# Altium PCB ControlPCB.PcbDoc
Units mm, origin at the board's own origin, x right, y up, seen from the top; angles counter-clockwise.
Board outline 50 x 100 mm, 4 copper layers (Top Layer, Layer 2, Layer 3, Bottom Layer), stack 1.369 mm thick; 84 components, 77 nets, 353 pads, 81 vias.
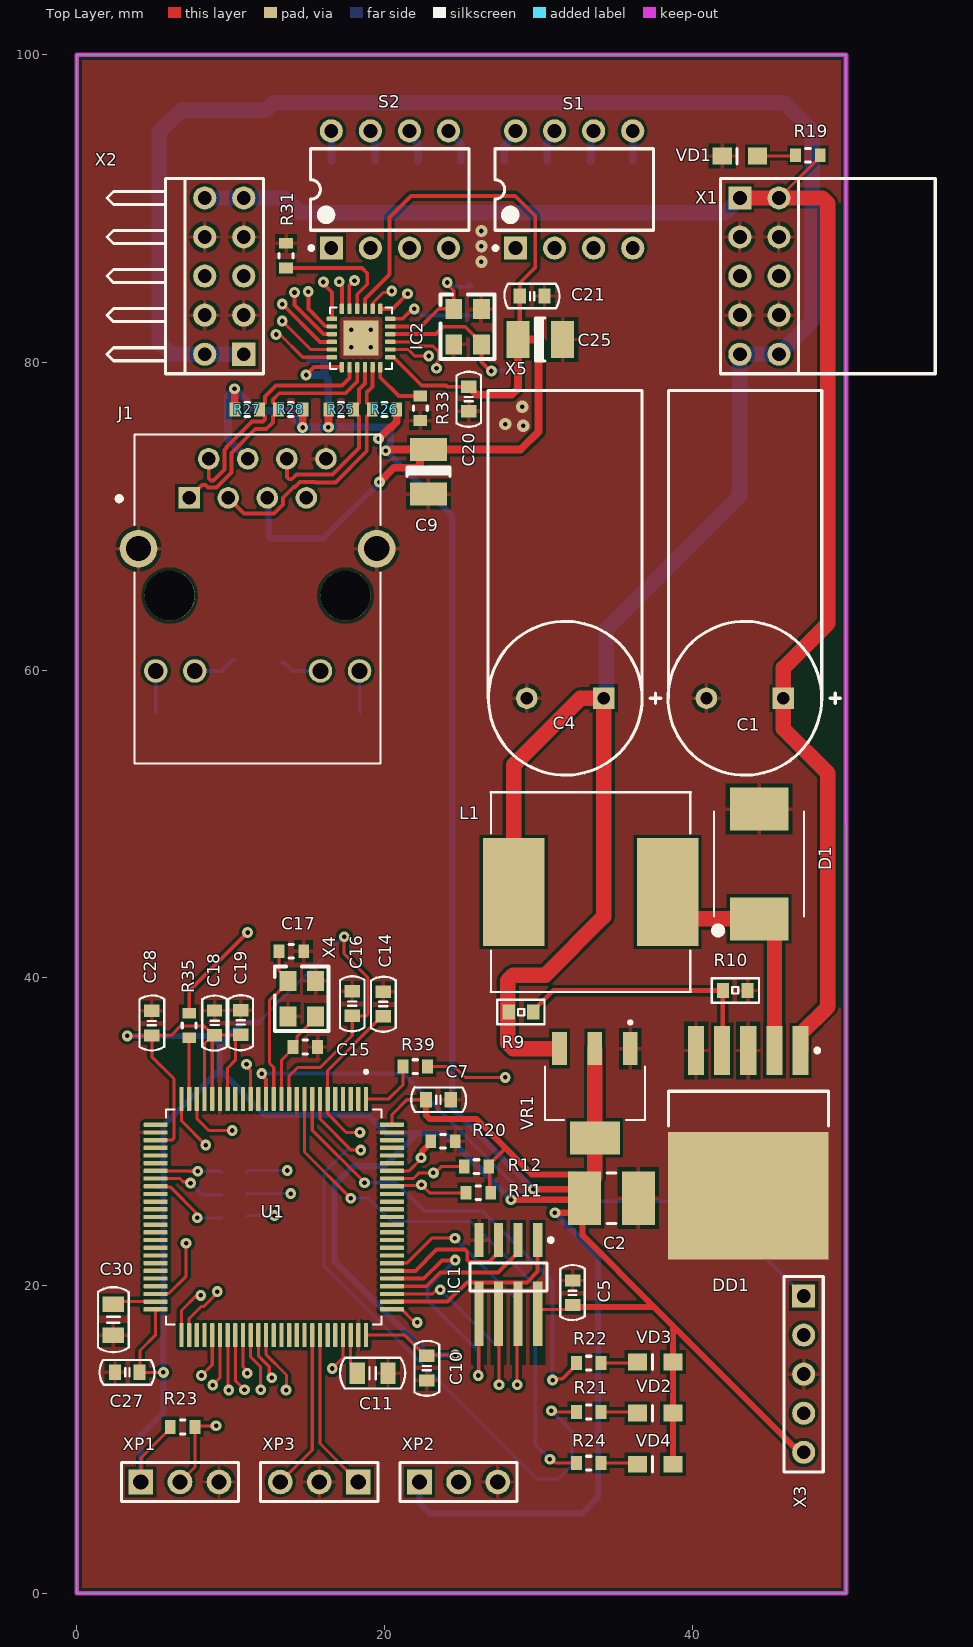
[diagram p0: Top Layer view]
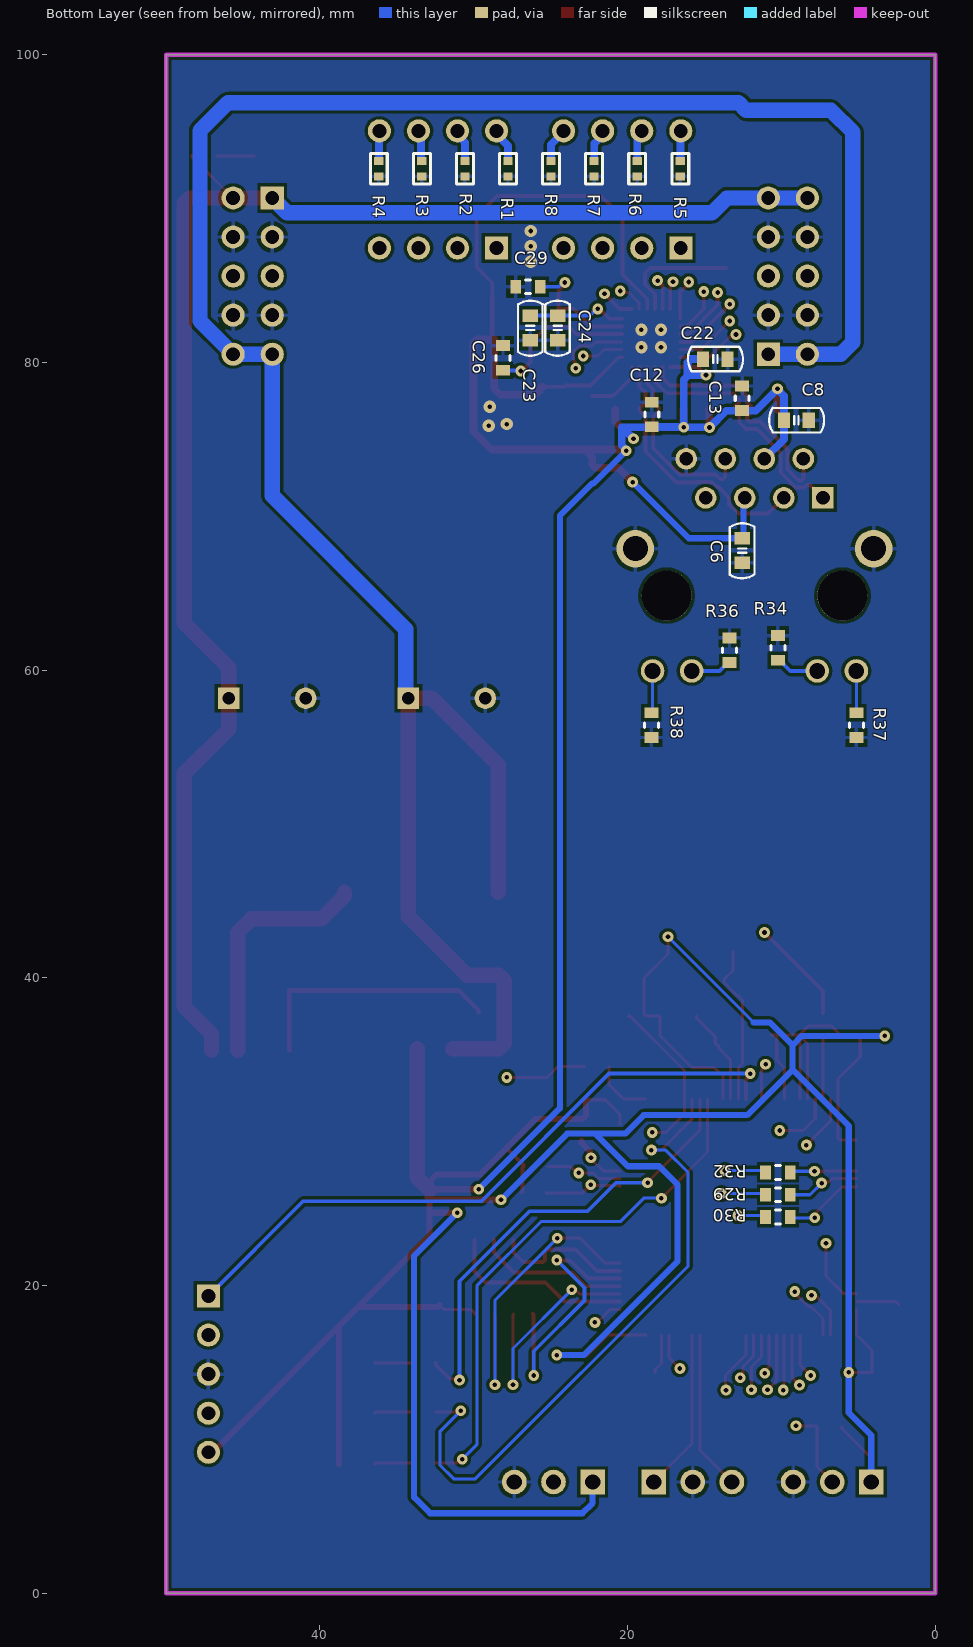
[diagram p1: Bottom Layer view, seen from below]
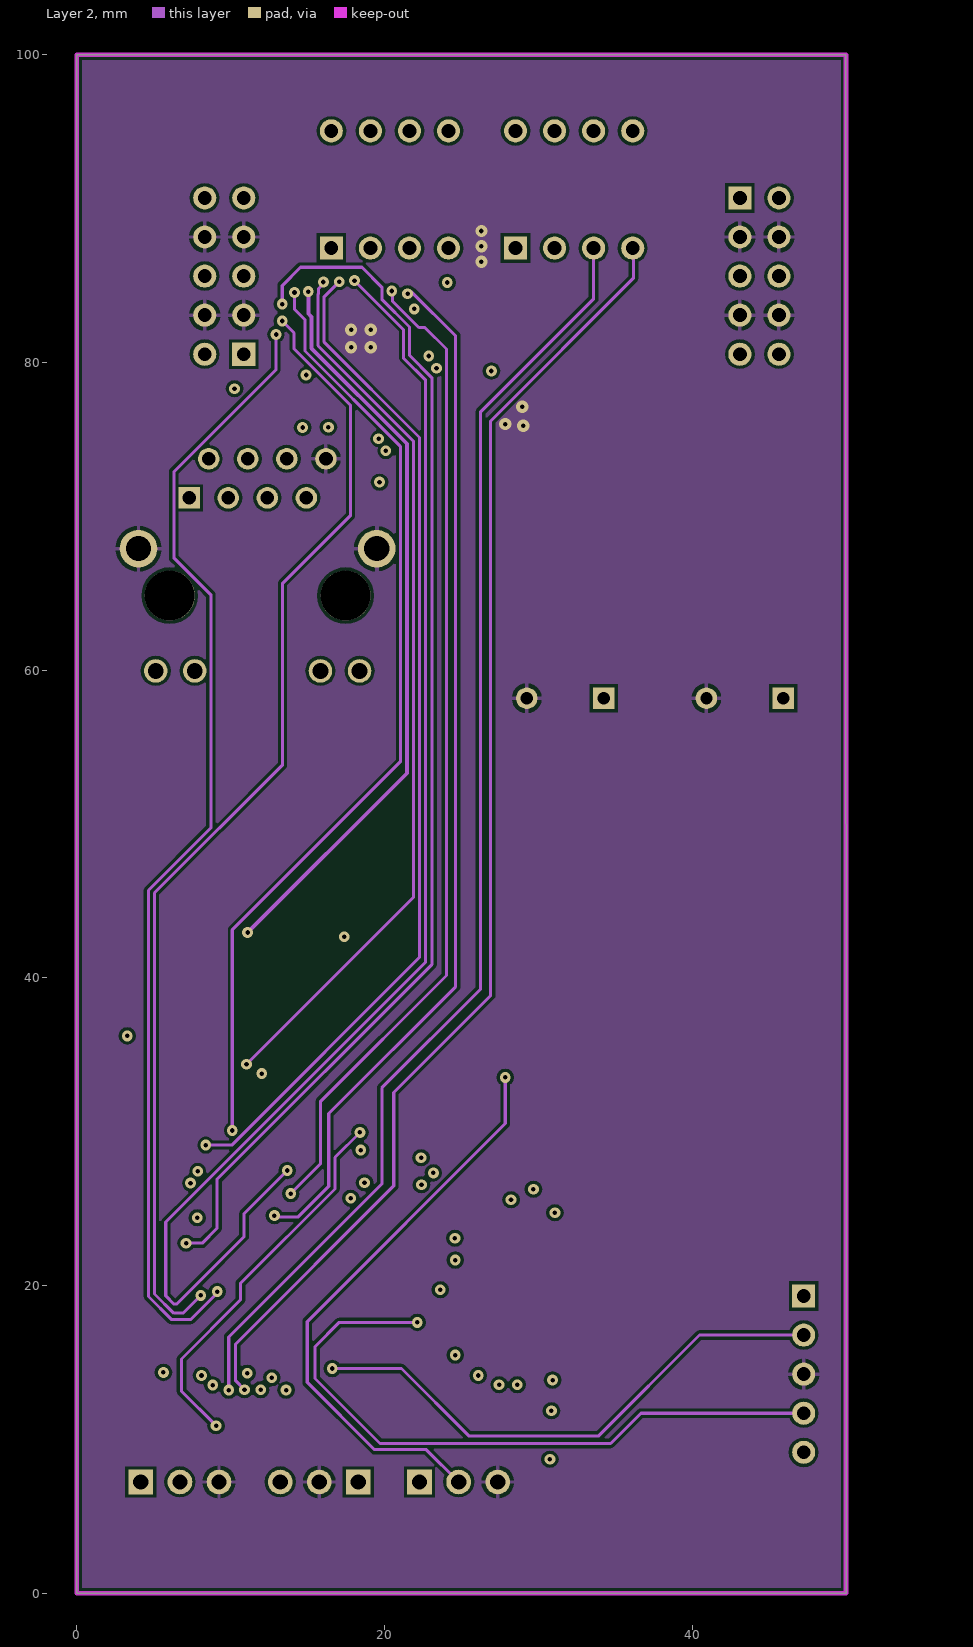
[diagram p2: Layer 2]
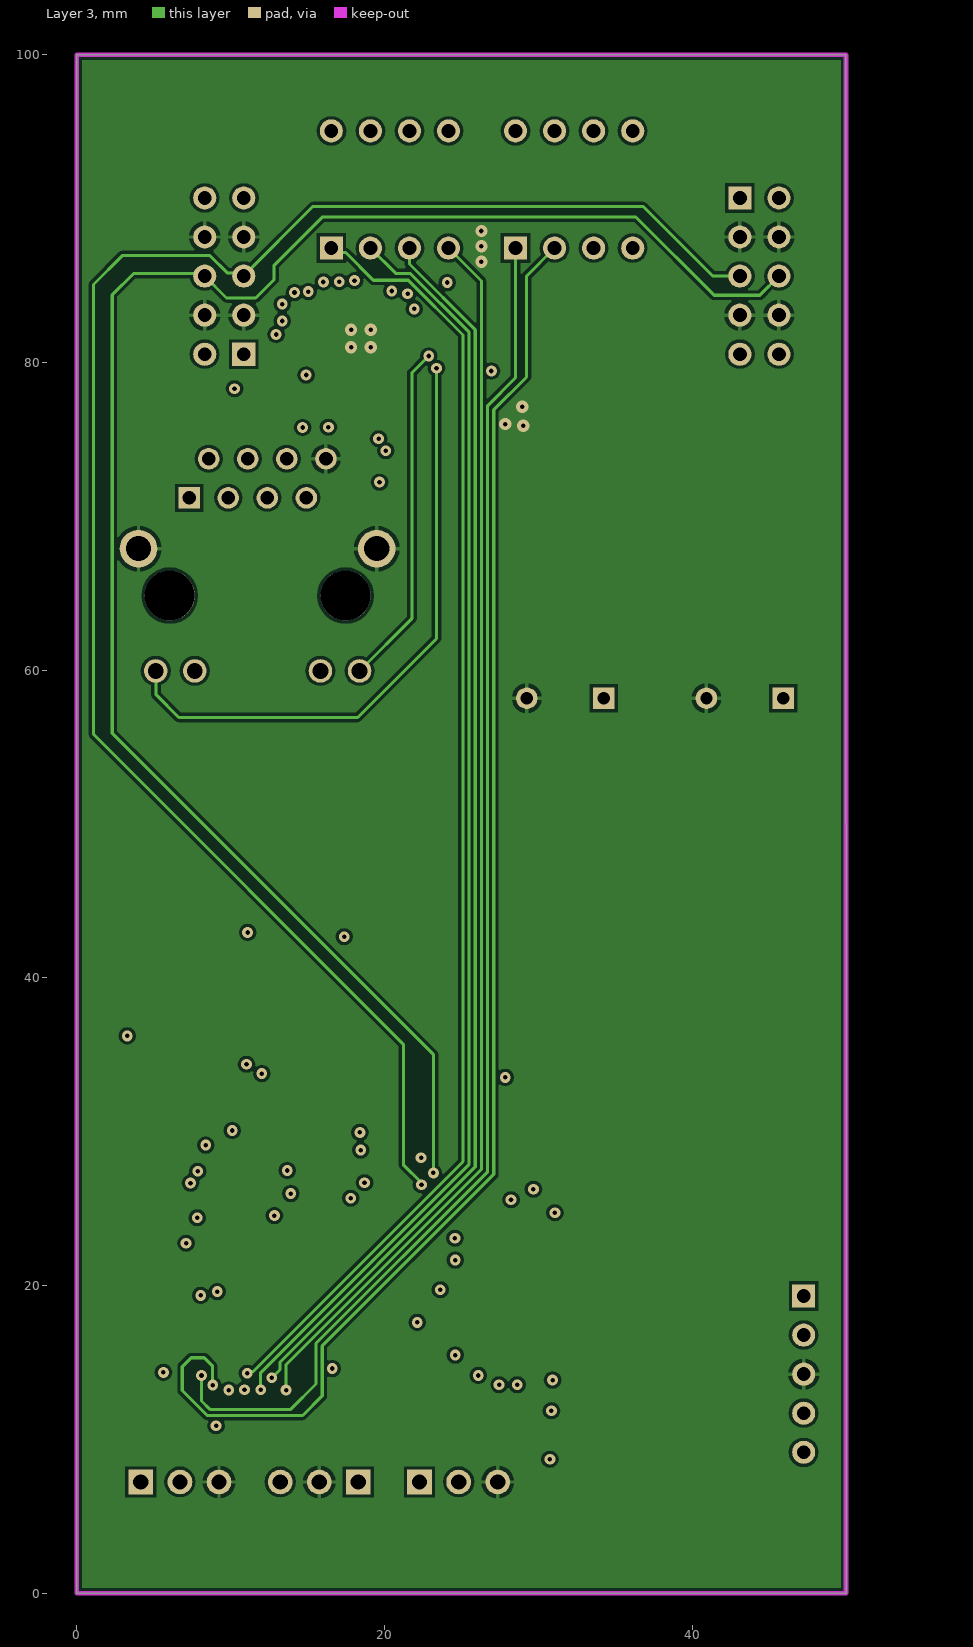
[diagram p3: Layer 3]

## Layer stack, top to bottom
Top Solder: solder mask 0.0254, SM-001, Dk 4
Top Layer: signal copper 0.035
Dielectric 1: prepreg 0.1295, PP-017, Dk 4.3
Dielectric 2: prepreg 0.1295, PP-017, Dk 4.3
Layer 2: signal copper 0.035
Dielectric 3: core 0.7112, Core-039, Dk 4.8
Layer 3: signal copper 0.035
Dielectric 4: prepreg 0.1295, PP-017, Dk 4.3
Dielectric 5: prepreg 0.1295, PP-017, Dk 4.3
Bottom Layer: signal copper 0.035
Bottom Solder: solder mask 0.0254, SM-001, Dk 4

## Board outline
0,0 50,0 50,100 0,100

## Design rules (kind name [scope] priority, off if disabled: settings)
Clearance Clearance_1 [InNetClass('ISO') vs InNet('GND')] p1: gap=1 ignorepadtopadclearanceinfootprint=FALSE
Clearance [All] p2: gap=0.2 ignorepadtopadclearanceinfootprint=FALSE
Clearance Clearance_2 [All] p3: gap=0.2 ignorepadtopadclearanceinfootprint=TRUE except(0: Arc-SMDPad Arc-THPad Arc-Via Track-SMDPad Track-THPad Track-Via SMDPad-SMDPad SMDPad-THPad SMDPad-Via Via-Hole)
ComponentClearance [InComponentClass('J*') vs InComponentClass('J*')] p1: gap=0.01 collisioncheckmode=3 verticalgap=0.01 showdistances=FALSE
DiffPairsRouting [All] p1: maxlimit=0.254 minlimit=0.2 mostfreqgap=0.254 toplayer_minwidth=0.25 toplayer_maxwidth=0.381 toplayer_prefwidth=0.381 midlayer1_minwidth=0.25 midlayer1_maxwidth=0.381 midlayer1_prefwidth=0.381 midlayer2_minwidth=0.25 midlayer2_maxwidth=0.381 midlayer2_prefwidth=0.381 bottomlayer_minwidth=0.25 bottomlayer_maxwidth=0.381 bottomlayer_prefwidth=0.381 maxuncoupledlength=12.7
HoleSize [All] p1: absolutevalues=TRUE maxlimit=5 minlimit=0.025 maxpercent=80.000 minpercent=20.000
MinimumSolderMaskSliver [All] p1: minsoldermaskwidth=0
PolygonConnect [All] p1: connectstyle=Relief reliefconductorwidth=0.254 reliefentries=4 polygonreliefangle="90 Angle" airgapwidth=0.254
RoutingVias [All] p1: holewidth=0.3 width=1 viastyle="Through Hole" minholewidth=0.3 minwidth=0 maxholewidth=1 maxwidth=4
SilkToSolderMaskClearance [IsPad] p1: minsilkscreentomaskgap=0.1 clearancetoexposedcopper=TRUE
SolderMaskExpansion [All] p1: expansion=0.102 istentingtop=FALSE
UnRoutedNet [All] p1: checkbadconnections=TRUE
Width [All] p1: maxlimit=4 minlimit=0.15 preferedwidth=0.254
24 further rules are at their usual default settings.

## Classes and differential pairs
differential pair P1_TX: +P1_TX_P -P1_TX_N
differential pair P1_RX: +P1_RX_P -P1_RX_N

## Components (designator, comment, footprint, x,y, rotation, side; value= is the part's Value field where it differs from the comment)
C1 "220uF 50v" "ECR 10x13mm" 43.425,58.175 r180 top value=220uF
C2 "Cap C" CAPCHIP1812 34.75,25.675 r180 top value="4.7 uF"
C4 "220uF 50v" "ECR 10x13mm" 31.75,58.175 r180 top value=220uF
C5 "0603 0.1uF" "CAPACITOR 0603" 32.225,18.725 r90 top
C6 "0603 0.1uF" "CAPACITOR 0603" 12.55,68.575 r270 bottom
C7 "0603 0.1uF" "CAPACITOR 0603" 22.7,32.075 r0 top
C8 "0603 0.1uF" "CAPACITOR 0603" 9.825,76.25 r180 bottom
C9 "Cap T" "TECAP B" 22.85,72.9 r270 top value="10u 16V"
C10 "0603 0.1uF" "CAPACITOR 0603" 22.75,15.425 r270 top
C11 "0805 2.2uF" "CAPACITOR 0805" 18.225,14.3 r0 top
C12 "0603 0.1uF" CAPCHIP0603 18.425,76.625 r90 bottom
C13 "0603 0.1uF" CAPCHIP0603 12.55,77.675 r90 bottom
C14 "0603 0.1uF" "CAPACITOR 0603" 19.925,39.1 r270 top
C15 "0603 18 пФ" CAPCHIP0603 14.85,35.5 r180 top
C16 "0603 0.1uF" "CAPACITOR 0603" 17.9,39.125 r270 top
C17 "0603 18 пФ" CAPCHIP0603 13.944,41.725 r180 top
C18 "0603 0.1uF" "CAPACITOR 0603" 8.95,37.875 r270 top
C19 "0603 0.001uF" "CAPACITOR 0603" 10.65,37.9 r270 top
C20 "0603 0.1uF" "CAPACITOR 0603" 25.475,78.425 r270 top
C21 "0603 0.1uF" "CAPACITOR 0603" 30.4,84.325 r180 top
C22 "0603 0.1uF" "CAPACITOR 0603" 15.1,80.225 r180 bottom
C23 "0603 0.1uF" "CAPACITOR 0603" 26.325,83.05 r270 bottom
C24 "0603 1uF" "CAPACITOR 0603" 24.55,83.05 r270 bottom
C25 "TECAP B 10u 16V" "TECAP B" 30.125,81.5 r0 top
C26 "0603 18 пФ" CAPCHIP0603 28.1,80.3 r270 bottom
C27 "0603 0.1uF" "CAPACITOR 0603" 4.075,14.35 r180 top
C28 "0603 0.1uF" "CAPACITOR 0603" 4.875,36.25 r90 top
C29 "0603 18 пФ" CAPCHIP0603 26.475,84.925 r180 bottom
C30 "0805 2.2uF" "CAPACITOR 0805" 2.375,16.775 r90 top
D1 "MBRS540T3G" DIOM7958X213N 44.35,47.4 r90 top value="0603 0.1uF"
DD1 "LM2596S-ADJ" TO-263 43.65,29.275 r270 top
IC1 "GD25Q16CTIGR" NSO8 28.05,20.55 r270 top value=GD25Q16CT
IC2 "LAN8742A-CZ-TR" LAN8742A 19.725,82.845 r180 top
J1 "HR911105A" HANRUN_HR911105A 11.75,64.85 r180 top
L1 "SRR1208-6R5ML" SRR1208 33.4,45.575 r180 top
R1 "10K" "Resistor 0402" 27.775,92.1 r90 bottom
R2 "10K" "Resistor 0402" 30.575,92.1 r90 bottom
R3 "10K" "Resistor 0402" 33.375,92.1 r90 bottom
R4 "10K" "Resistor 0402" 36.175,92.1 r90 bottom
R5 "10K" "Resistor 0402" 16.575,92.1 r90 bottom
R6 "10K" "Resistor 0402" 19.375,92.1 r90 bottom
R7 "10K" "Resistor 0402" 22.175,92.1 r90 bottom
R8 "10K" "Resistor 0402" 24.975,92.1 r90 bottom
R9 "0603 3k" "Resistor 0603" 29.675,37.775 r180 top
R10 "0603 1k" "Resistor 0603" 42,39.175 r0 top
R11 "4.7k" RESCHIP0603 26.1,26.025 r0 top
R12 "4.7k" RESCHIP0603 25.975,27.725 r0 top
R19 "10K" RESCHIP0603 47.525,93.475 r0 top
R20 "510R" RESCHIP0603 23.8,29.375 r180 top
R21 "3K" RESCHIP0603 33.275,11.775 r0 top
R22 "3K" RESCHIP0603 33.275,14.95 r0 top
R23 "0" RESCHIP0603 6.875,10.8 r0 top
R24 "3K" RESCHIP0603 33.275,8.45 r0 top
R25 "0603 50R" RESCHIP0603 17.175,76.95 r180 top
R26 "0603 50R" RESCHIP0603 20,76.95 r0 top
R27 "0603 50R" RESCHIP0603 11.075,76.95 r180 top
R28 "0603 50R" RESCHIP0603 13.9,76.95 r0 top
R29 "0603 33R" RESCHIP0603 10.225,25.9 r0 bottom
R30 "0603 33R" RESCHIP0603 10.225,24.45 r0 bottom
R31 "0603 10k" RESCHIP0603 13.6,86.95 r270 top
R32 "0603 33R" RESCHIP0603 10.225,27.35 r0 bottom
R33 "0603 12.1k" RESCHIP0603 22.325,77.025 r270 top
R34 "0603 220 Ом" RESCHIP0603 10.225,61.45 r270 bottom
R35 "0603 33R" RESCHIP0603 7.3,36.9 r90 top
R36 "0603 220 Ом" RESCHIP0603 13.375,61.3 r270 bottom
R37 "0603 1,5k" RESCHIP0603 5.125,56.425 r90 bottom
R38 "0603 1,5k" RESCHIP0603 18.45,56.425 r90 bottom
R39 "510R" RESCHIP0603 22,34.225 r180 top
S1 "SW-DIP4" DIP-8 32.325,91.25 r90 top
S2 "SW-DIP4" DIP-8 20.35,91.25 r90 top locked
U1 "STM32F407V" QFP50P1600X1600X160-100N 12.8,24.45 r270 top
VD1 "" 0805- 44.25,93.425 r180 top value=0805
VD2 "" 0805- 38.75,11.7 r180 top value=0805
VD3 "" 0805- 38.75,15.025 r180 top value=0805
VD4 "" 0805- 38.75,8.375 r180 top value=0805
VR1 "LM1117MPX-3.3" VREG_LM1117MPX-3.3 33.675,32.5 r270 top
X1 "PBD-10R" PBD-10RR 43.1,90.7 r270 top
X2 "PLD-10R" PLD-10RR1 10.85,80.54 r90 top
X3 "PLS-5" PLS-5-3D 47.25,19.315 r270 top
X4 "12Mhz" XTAL_3.2_2.5 13.725,39.8 r270 top value="3.3_2.5 12Mhz"
X5 "25Mhz" XTAL_3.2_2.5 24.5,83.475 r270 top value="3.3_2.5 25Mhz"
XP1 "Battery" ZL201-3 6.7,7.225 r0 top
XP2 "reset setings" ZL201-3 24.815,7.225 r0 top
XP3 "UART" ZL201-3 15.757,7.225 r180 top value=uart

## Footprints (in the part's own frame and the unit in brackets; to place one, negate y for a bottom-side part, rotate by r counter-clockwise, add the part's x,y. Pads: shape width x height; smd on the part's side, far side on the other; paste and mask are expansions set on the pad)
0805- [mm]
  rect 1.25x1.1 smd mask+0.06: A(0,0) K(2.3,0)
  silkscreen extent 1.33,-0.5 1.33,0.5, body extent 0.12,-0.62 2.14,0.63, height 1.1
"CAPACITOR 0603" [mm]
  rect 0.8x1 smd: 1(0,0) 2(1.6,0)
  silkscreen extent -0.97,-0.8 2.6,0.8, body extent -0.01,-0.38 1.64,0.42, height 0.81
"CAPACITOR 0805" [mm]
  rect 1x1.4 smd: 1(0,0) 2(2,0)
  silkscreen extent -1.12,-1 3.12,1, body extent 0.01,-0.6 2.01,0.6, height 1.26
CAPCHIP0603 [mm] "Chip Capacitor, 2-Leads, Body 1,6x0,8mm"
  rect 0.7x0.9 smd mask+0.06: 1(-0.8,0) 2(0.8,0)
  silkscreen extent -0.15,-0.45 0.15,0.45, body extent -0.8,-0.4 0.8,0.4, height 0.9
CAPCHIP1812 [mm] "Chip Capacitor, 2-Leads, Body 4,50x3,20mm,"
  rect 2.15x3.5 smd mask+0.06: 1(-1.75,0) 2(1.75,0)
  silkscreen extent -0.3,-1.65 0.3,1.65, body extent -2.25,-1.6 2.25,1.6, height 1
DIOM7958X213N [mil]
  rect 110x150 smd: A(140.49,0) C(-140.49,0)
  silkscreen extent -176,-115 135,115
DIP-8 [mm] "DIP; 8 Leads; Row Spacing 7.62 mm; Pitch 2.54 mm"
  rect 1.5x1.5 hole 0.9: 1(-3.81,3.81)
  round 1.5 hole 0.9: 2(-3.81,1.27) 3(-3.81,-1.27) 4(-3.81,-3.81) 5(3.81,-3.81) 6(3.81,-1.27) 7(3.81,1.27) 8(3.81,3.81)
  silkscreen extent -3.93,-5.15 2.65,5.23, body extent -3.6,-5.15 3.6,5.15, height 5.08
"ECR 10x13mm" [mm] "Rad Capacitor 50В-220мкФ"
  rect 1.4x1.4 hole 0.8 mask+0.06: 1(-2.5,0)
  round 1.4 hole 0.8 mask+0.06: 2(2.5,0)
  silkscreen extent -6.22,-5 5,5
HANRUN_HR911105A [mm]
  rect 1.398x1.398 hole 0.89: 1(4.45,-6.35)
  round 1.398 hole 0.89: 2(3.18,-8.89) 3(1.91,-6.35) 4(0.64,-8.89) 5(-0.63,-6.35) 6(-1.9,-8.89) 7(-3.17,-6.35) 8(-4.44,-8.89)
  round 1.53 hole 1.02: 9(6.625,4.9) 10(4.085,4.9) 11(-4.085,4.9) 12(-6.625,4.9)
  round 2.445 hole 1.63: 15(7.745,-3.05) 16(-7.745,-3.05)
  round 3.25 hole 3.25 unplated: ""(-5.715,0) ""(5.715,0)
  silkscreen extent -8,-10.48 9.15,10.92, body extent -8.01,-10.45 7.87,10.95, height 14
LAN8742A [mm]
  rrect50% 0.69x0.28 smd: 1(-0.645,2.5) 2(-0.645,2) 3(-0.645,1.5) 4(-0.645,1) 5(-0.645,0.5) 6(-0.645,0) 13(3.145,0) 14(3.145,0.5) 15(3.145,1) 16(3.145,1.5) 17(3.145,2) 18(3.145,2.5)
  rrect50% 0.28x0.69 smd: 7(0,-0.645) 8(0.5,-0.645) 9(1,-0.645) 10(1.5,-0.645) 11(2,-0.645) 12(2.5,-0.645) 19(2.5,3.145) 20(2,3.145) 21(1.5,3.145) 22(1,3.145) 23(0.5,3.145) 24(0,3.145)
  rect 2.286x2.286 smd: 25(1.25,1.25)
  silkscreen extent -0.75,-0.74 3.26,3.27, body extent -0.75,-0.74 3.26,3.27, height 1
NSO8 [mm] "SOIC, 8-Leads, Body 4.9x3.9mm, Pitch 1.27mm"
  rect 2.2x0.6 smd mask+0.06: 1(-2.4,1.905) 2(-2.4,0.635) 3(-2.4,-0.635) 4(-2.4,-1.905)
  rect 4.2x0.6 smd mask+0.06: 5(2.4,-1.905) 6(2.4,-0.635) 7(2.4,0.635) 8(2.4,1.905)
  silkscreen extent -2.52,-2.5 0.9,2.88, body extent -3,-2.45 3,2.45, height 1.7
PBD-10RR [mm] "Connector; Header; 5x2 Position"
  rect 1.5x1.5 hole 0.9: 1(0,0)
  round 1.5 hole 0.9: 2(0,2.54) 3(2.54,0) 4(2.54,2.54) 5(5.08,0) 6(5.08,2.54) 7(7.62,0) 8(7.62,2.54) 9(10.16,0) 10(10.16,2.54)
  silkscreen extent -1.27,-1.27 11.43,12.7, body extent -1.27,-0.3 11.43,12.7, height 5
PLD-10RR1 [mm] "Connector; Header; 5x2 Position"
  rect 1.5x1.5 hole 0.9: 1(0,0)
  round 1.5 hole 0.9: 2(0,2.54) 3(2.54,0) 4(2.54,2.54) 5(5.08,0) 6(5.08,2.54) 7(7.62,0) 8(7.62,2.54) 9(10.16,0) 10(10.16,2.54)
  silkscreen extent -1.27,-1.27 11.43,8.89, body extent -1.27,-1.27 11.43,9.89, height 7.99
PLS-5-3D [mm] "Connector; Header; 5 Position"
  rect 1.5x1.5 hole 0.9: 1(0,0)
  round 1.5 hole 0.9: 2(2.54,0) 3(5.08,0) 4(7.62,0) 5(10.16,0)
  silkscreen extent -1.27,-1.27 11.43,1.27, body extent -1.27,-1.27 11.43,1.27, height 8.44
QFP50P1600X1600X160-100N [mm]
  rrect25% 1.56x0.28 smd: 1(-7.68,6) 2(-7.68,5.5) 3(-7.68,5) 4(-7.68,4.5) 5(-7.68,4) 6(-7.68,3.5) 7(-7.68,3) 8(-7.68,2.5) 9(-7.68,2) 10(-7.68,1.5) 11(-7.68,1) 12(-7.68,0.5) 13(-7.68,0) 14(-7.68,-0.5) 15(-7.68,-1) 16(-7.68,-1.5) 17(-7.68,-2) 18(-7.68,-2.5) 19(-7.68,-3) 20(-7.68,-3.5) 21(-7.68,-4) 22(-7.68,-4.5) 23(-7.68,-5) 24(-7.68,-5.5) 25(-7.68,-6) 51(7.68,-6) 52(7.68,-5.5) 53(7.68,-5) 54(7.68,-4.5) 55(7.68,-4) 56(7.68,-3.5) 57(7.68,-3) 58(7.68,-2.5) 59(7.68,-2) 60(7.68,-1.5) 61(7.68,-1) 62(7.68,-0.5) 63(7.68,0) 64(7.68,0.5) 65(7.68,1) 66(7.68,1.5) 67(7.68,2) 68(7.68,2.5) 69(7.68,3) 70(7.68,3.5) 71(7.68,4) 72(7.68,4.5) 73(7.68,5) 74(7.68,5.5) 75(7.68,6)
  rrect25% 0.28x1.56 smd: 26(-6,-7.68) 27(-5.5,-7.68) 28(-5,-7.68) 29(-4.5,-7.68) 30(-4,-7.68) 31(-3.5,-7.68) 32(-3,-7.68) 33(-2.5,-7.68) 34(-2,-7.68) 35(-1.5,-7.68) 36(-1,-7.68) 37(-0.5,-7.68) 38(0,-7.68) 39(0.5,-7.68) 40(1,-7.68) 41(1.5,-7.68) 42(2,-7.68) 43(2.5,-7.68) 44(3,-7.68) 45(3.5,-7.68) 46(4,-7.68) 47(4.5,-7.68) 48(5,-7.68) 49(5.5,-7.68) 50(6,-7.68) 76(6,7.68) 77(5.5,7.68) 78(5,7.68) 79(4.5,7.68) 80(4,7.68) 81(3.5,7.68) 82(3,7.68) 83(2.5,7.68) 84(2,7.68) 85(1.5,7.68) 86(1,7.68) 87(0.5,7.68) 88(0,7.68) 89(-0.5,7.68) 90(-1,7.68) 91(-1.5,7.68) 92(-2,7.68) 93(-2.5,7.68) 94(-3,7.68) 95(-3.5,7.68) 96(-4,7.68) 97(-4.5,7.68) 98(-5,7.68) 99(-5.5,7.68) 100(-6,7.68)
  silkscreen extent -9.54,-7 7,7
RESCHIP0603 [mm] "Chip Resistor, 2-Leads, Body 1,6x0,8mm"
  rect 0.7x0.9 smd mask+0.06: 1(-0.8,0) 2(0.8,0)
  silkscreen extent -0.15,-0.45 0.15,0.45, body extent -0.8,-0.4 0.8,0.4, height 0.4
"Resistor 0402" [mm]
  rect 0.5x0.6 smd: 1(0,0) 2(1,0)
  silkscreen extent -0.5,-0.55 1.5,0.55, body extent 0,-0.28 1,0.27, height 0.46
"Resistor 0603" [mm]
  rect 0.8x1 smd: 1(0,0) 2(1.6,0)
  silkscreen extent -0.72,-0.8 2.35,0.8, body extent -0.03,-0.45 1.63,0.45, height 0.46
SRR1208 [mm]
  rect 4x7 smd: P$1(-5,0) P$2(5,0)
  silkscreen extent -6.5,-6.5 6.5,6.5
"TECAP B" [mm] "Chip Capacitor, 2-Leads, Body 3,5x2,8mm"
  rect 1.5x2.4 smd mask+0.06: 1(-1.45,0) 2(1.45,0)
  silkscreen extent -0.3,-1.4 0.3,1.4, body extent -1.75,-1.4 1.75,1.4, height 1.92
TO-263 [mm] "D2-PAK, 6-Leads, Body 8.6x10.2mm, Pitch 1.7mm, Lead Span 14.1mm"
  rect 3.2x1.05 smd mask+0.06: 1(-6,3.4) 2(-6,1.7) 3(-6,0) 4(-6,-1.7) 5(-6,-3.4)
  rect 8.3x10.45 smd mask+0.06: 6(3.45,0)
  silkscreen extent -6.12,-5.2 -1.1,5.2, body extent -7.18,-5.08 7.46,5.08, height 4.57
VREG_LM1117MPX-3.3 [mm]
  rect 2.15x0.95 smd: 1(-2.9,2.3) 2(-2.9,0) 3(-2.9,-2.3)
  rect 2.15x3.25 smd: 4(2.9,0)
  silkscreen extent -4.7,-3.25 1.75,3.25, body extent -3.5,-3.25 3.5,3.25, height 1.8
XTAL_3.2_2.5 [mm]
  rect 1.3x1.1 smd: 1(0,0) 2(2.3,0) 3(2.3,1.8) 4(0,1.8)
  silkscreen extent -0.94,-0.86 3.25,2.64, body extent -0.46,-0.34 2.74,2.16, height 0.82
ZL201-3 [mm] "Connector; PLS-3; pitch 2.54"
  rect 1.6x1.6 hole 1 mask+0.06: 1(-2.54,0)
  round 1.6 hole 1 mask+0.06: 2(0,0) 3(2.54,0)
  silkscreen extent -3.81,-1.27 3.81,1.27, body extent -3.81,-1.27 3.81,1.27, height 8.44

## Part data
C1 C4: library part "Cap Pol", "Polarized Capacitor (Rad)", Package=10x13, Voltage=50, Type=Type, URL=http://www.hitano.com.tw/PDF/ECR_081225.pdf
C2: "Ceramic Capacitor", Nominal_voltage_V={Nominal_voltage_V}, Package=1812, Tolerance_Percent={Tolerance_Percent}, Body={Body}, Class="Электронные компоненты", Installation={Installation}, Ordering_Information={Ordering_Information}, Pins={Pins}, SubClass=Конденсаторы, TKE={TKE}
C5 C6 C7 C8 C10 C14 C16 C18 C19 C20 C21 C22 C23 C24 C27 C28: library part Capasitor, Package=0603
C9: "Solid Tantalum Surface Mount Capacitors", Package="TECAP B", Voltage=16v, Type=Type
C11 C30: library part Capasitor, Package=0805
C12 C13 C15 C17 C26 C29: library part "Cap C", "Керамическтй конденсатор SMD C0603", Package=0603, Type=0603
C25: library part "Cap T", "Solid Tantalum Surface Mount Capacitors", Package="TECAP B", Voltage=16V, Type="TECAP B"
D1: "Diode Schottky 40V 5A Surface Mount SMC", Package="DO-214 ON Semiconductor", Availability=Unavailable, MF="ON Semiconductor", MP=MBRS540T3G, Price=None, SnapEDA_Link=https://www.snapeda.com/parts/MBRS540T3G/ON%20Semiconductor/view-part/78777/?ref=snap
DD1: "SIMPLE SWITCHER® Power Converter 150 KHz 3A Step-Down Voltage Regulator, 5-pin TO-263", Manufacturer="National Semiconductor", ComponentLink1URL=http://www.national.com/ds/LM/LM2596.pdf, ComponentLink2URL=http://www.national.com/pf/LM/LM2596.html, ComponentLink3URL=http://www.national.com/packaging/folders/ts5b.html, CompType=Switcher, PartNumber=LM2596S-ADJ, Published=13.04.2012, Publisher="Reukov A.V."
IC1: library part W25Q128FVEIG, "128M-bit Serial Flash Memory with uniform 4KB sectors and Dual/Quad SPI and QPI"
J1: "HR911105A Ethernet Interface Arduino Platform Evaluation Expansion Board", Package=None, Availability=Unavailable, MF=DFRobot, MP=HR911105A, Price=None, SnapEDA_Link=https://www.snapeda.com/parts/HR911105A/DFRobot/view-part/214807/?ref=snap
L1: "6.5ÂµH Shielded Wirewound Inductor 6A 18mOhm Max Nonstandard", Package="Nonstandard Bourns", Availability=Unavailable, MF=Bourns, MP=SRR1208-6R5ML, Price=None, SnapEDA_Link=https://www.snapeda.com/parts/SRR1208-6R5ML/Bourns/view-part/353452/?ref=snap
R1 R2 R3 R4 R5 R6 R7 R8: library part Resistor, Package=0402
R9 R10: library part Resistor, Package=0603
R11 R12 R19 R20 R21 R22 R23 R24 R39: library part Res, "Resistor", Package=0603, Tolerance_Percent={Tolerance_Percent}, CompType=Resistor, Pins=2
R25 R26 R27 R28 R29 R30 R31 R32 R33 R35 R37 R38: library part Res, "Резистор", Package=0603, Power_W={Power_W}, Tolerance_Percent={Tolerance_Percent}, Body={Body}, Class="Электронные компоненты", Installation={Installation}, Ordering_Information={Ordering_Information}, Pins=2, SubClass=Резисторы
R34 R36: library part Res, "Резистор SMD R0603", Package=0603, Tolerance=%, PWR=Value, Type=0603
S1 S2: "DIP Switch", Package=SW-DIP8, LatestRevisionDate=17-Jul-2002, LatestRevisionNote="Re-released for DXP Platform.", PackageReference=DIP-8, Published=24-Mar-1999, Publisher="Altium Limited"
U1: library part STM32F303V, "ARMÂ® CortexÂ®-M4 STM32F3 Microcontroller IC 32-Bit 72MHz 100-LQFP (14x14)", Package="LQFP-100 STMicroelectronics", Availability=Unavailable, MF=STMicroelectronics, MP=STM32F303V, Price=None
VD1 VD2 VD3 VD4: library part "LED SMD", Package=0805, CompType=LED, Pins=2
  VD2: Note=Read
  VD3: Note=Green
  VD4: Note=Blue
VR1: "800-mA 15-V linear voltage regulator", Package="SOT-223-4 Texas Instruments", Availability="In Stock", Check_prices=https://www.snapeda.com/parts/LM1117MPX-3.3/Texas+Instruments/view-part/?ref=eda, MF="Texas Instruments", MP=LM1117MPX-3.3, Price=None, Purchase-URL=https://pricing.snapeda.com/search/part/LM1117MPX-3.3/?ref=eda, SnapEDA_Link=https://www.snapeda.com/parts/LM1117MPX-3.3/Texas+Instruments/view-part/?ref=snap
X1 X2: "Header, 5-Pin, Dual row", Package=NC
X3: "Header, 5-Pin", LatestRevisionDate=17-Jul-2002, LatestRevisionNote="Re-released for DXP Platform.", Publisher="Altium Limited"
X4 X5: library part "XTAL 2-pin"
XP1: library part "Select jump", Package=NC, Class="Электронные компоненты", Installation=DIP, Ordering_Information={Ordering_Information}, Pins=3, Pitch_mm={Pitch_mm}, SubClass=Разъемы, Type_of_connector={Type_of_connector}
XP2 XP3: library part "Select jump", "Ter120", Package=NC, Class="Электронные компоненты", Installation=DIP, Ordering_Information={Ordering_Information}, Pins=3, Pitch_mm={Pitch_mm}, SubClass=Разъемы, Type_of_connector={Type_of_connector}

## Via types
v1: diameter 0.7, hole 0.3, Top Layer to Bottom Layer, tented both sides, 71 vias
v2: diameter 0.8, hole 0.3, Top Layer to Bottom Layer, tented both sides, 10 vias

## Nets (pads, with @x,y where several pads share a name; then routed paths per layer and width w, separated by ;. In a path a pad name is that pad's centre, name@x,y a point inside that pad or via, vN(x,y) a via of type N, cw(c..) or ccw(c..) an arc to the next point about the centre after c; other vN are vias at no path point)
+3.3v: C2.2 C5.1 C6.1 C7.1 C8.1 C9.1 C10.1 C12.1 C13.1 C16.2 C18.2 C19.2 C20.1 C21.2 C22.1 C25.1 C27.1 C28.1 IC1.8 IC2.1 IC2.9 IC2.19 J1.4 J1.5 R11.2 R12.2 R23.1 R25.2 R26.2 R27.2 R28.2 U1.11 U1.19 U1.21 U1.22 U1.28 U1.50 U1.75 U1.100 VD2.A VD3.A VD4.A VR1.2 VR1.4 X3.5 XP1.1 XP2.1 | length 424.4
  Top Layer w0.2: v1(3.275,36.225) 4.85,36.225 C28.1 ; XP1.1 4.16,8.785 6.075,10.7 R23.1 ; U1.50 5.12,16.795 4.1,15.775 4.1,14.375 C27.1 v1(5.625,14.35) ; U1.28 6.2,29.45 6.317,29.567 6.317,33.433 4.875,34.875 C28.1 ; U1.22 8.3,35.725 C18.2@8.85,36.275 ; U1.21 8.8,36.125 C18.2 ; U1.19 9.8,34.142 10.3,34.643 C19.2@10.3,36.1 ; C19.2 10.625,36.275 C18.2 ; U1.11 13.8,33.618 14.358,34.175 15.825,34.175 17.9,36.25 C16.2 18.808,37.525 18.925,37.642 18.925,40 17.375,41.55 v1(17.375,42.675) ; U1.75 21.305,16.77 22.65,15.425 C10.1 22.8,15.475 v1(24.6,15.475) ; U1.100 20.48,31.105 21.45,32.075 C7.1 ; IC1.8 29.955,18.225 30.155,18.425 31.925,18.425 C5.1 ; C28.1 6.125,36.25 6.75,36.875 8.25,36.875 C18.2@8.85,36.275 ; C18.2@8.85,36.275 C18.2
  Top Layer w0.25: v1(14.902,79.186) 15.416,79.7 IC2.19 ; IC2.9 18.725,84.125 20.325,85.725 20.325,89.425 21.725,90.825 28.5,90.825 29.8,89.525 29.8,86.184 28.8,85.184 C21.2 ; IC2.1 20.575,80.345 22.42,78.5 24,78.5 24.075,78.425 C20.1 ; R11.2 26.837,26.088 26.837,27.662 R12.2 26.775,27.825 27.775,28.825 27.775,29.025
  Top Layer w0.3: C25.1 28.8,81.625 C21.2
  Top Layer w0.4: C7.1 22.7,31.05 22.925,30.825 25.975,30.825 27.775,29.025 29.575,27.225 32.4,27.225 33,26.625 33,26.35 C2.2 ; v1(28.225,25.575) 32.75,25.575 C2.2@32.875,25.45 ; v1(29.679,26.254) 32.421,26.254 C2.2 ; v1(31.075,24.725) 32.725,24.725 C2.2@32.875,24.875 ; C5.1 32.35,18.6 37.525,18.6 ; VD4.A VD2.A VD3.A 38.75,17.375 ; X3.5 46.97,9.155 38.75,17.375 ; C2.2@32.875,24.875 32.875,23.25 37.525,18.6 ; C2.2@32.875,24.875 C2.2@32.875,25.45 ; C2.2@32.875,25.45 32.875,25.55 C2.2 ; 37.525,18.6 38.75,17.375
  Top Layer w0.5: v1(10.25,78.3) 10.263,78.287 10.263,76.963 R27.2 ; v1(14.675,75.775) 14.688,75.788 14.688,76.938 R28.2 ; v1(16.35,75.8) 16.362,75.813 16.362,76.938 R25.2 ; v1(19.614,75.039) 20.375,75.8 20.45,75.8 20.8,76.15 R26.2 ; v1(19.675,72.225) 20.6,73.15 22.1,73.15 22.305,73.355 22.305,73.85 C9.1@22.805,74.35 ; v1(20.082,74.271) 20.162,74.35 C9.1@22.805,74.35 ; C20.1 25.575,78.425 25.725,78.275 25.725,78.175 26,77.9 28.275,77.9 28.675,78.3 C25.1 29.807,81.5 30.012,81.295 30.012,75.512 28.85,74.35 C9.1 C9.1@22.805,74.35
  Top Layer w1: C2.2@33,26.35 33.675,27.025 VR1.4 VR1.2
  Bottom Layer w0.2: 11.8,37.1 v1(17.375,42.675)
  Bottom Layer w0.4: v1(3.275,36.225) 8.675,36.225 9.275,35.625 ; XP1.1 4.16,10.26 5.625,11.725 v1(5.625,14.35) 5.625,30.375 9.275,34.025 ; 11.8,37.1 10.75,37.1 9.275,35.625 ; J1.5 12.465,71.115 12.465,68.66 C6.1 16.025,68.575 v1(19.675,72.225) ; v1(20.082,74.271) 22.225,72.128 22.314,72.128 24.4,70.042 24.4,31.525 29.671,26.254 v1(29.679,26.254) ; XP2.1 22.275,5.85 22.934,5.191 32.841,5.191 33.875,6.225 33.875,21.925 v1(31.075,24.725) ; v1(24.6,15.475) 22.85,15.475 16.75,21.575 16.75,26.55 17.95,27.75 19.975,27.75 22.1,29.875 ; v1(28.225,25.575) 23.925,29.875 22.1,29.875 ; 9.275,34.025 12.225,31.075 18.95,31.075 20.15,29.875 22.1,29.875 ; 9.275,34.025 9.275,35.625
  Bottom Layer w0.5: J1.4 9.825,75.025 C8.1 9.825,77.821 10.25,78.246 v1(10.25,78.3) 11.675,76.875 C13.1 13.575,76.875 v1(14.675,75.775) 14.688,75.788 16.337,75.788 v1(16.35,75.8) ; v1(14.902,79.186) 16.1,79.186 ; C22.1 15.882,80.225 16.1,80.007 16.1,79.132 16.35,78.882 v1(16.35,75.8) ; C12.1 C12.1@18.413,75.813 ; v1(19.614,75.039) 20.215,75.64 20.215,75.8 ; v1(20.082,74.271) 20.082,74.325 20.182,74.425 20.182,74.427 20.375,74.619 20.375,75.8 18.55,75.8 18.538,75.813 C12.1@18.413,75.813 ; v1(16.35,75.8) 16.362,75.813 C12.1@18.413,75.813
+5v: C4.1 L1.P$2 R9.2 VR1.3 X1.9 X1.10 X2.1 X2.2 | length 153.1
  Top Layer w1: L1.P$2 28.4,53.85 32.725,58.175 C4.1 34.25,43.975 30.45,40.175 28.361,40.175 28.009,39.824 28.009,35.751 28.361,35.4 VR1.3
  Bottom Layer w1: X2.1 X2.2 6.135,80.54 5.35,81.325 5.35,94.975 6.775,96.4 12.288,96.4 12.788,96.9 45.975,96.9 47.8,95.075 47.8,82.7 X1.10 X1.9 43.1,71.35 34.425,62.675 34.425,58.35 C4.1
Eth_NRST: IC2.15 U1.23 | length 69.8
  Top Layer w0.2: U1.23 7.8,30.85 8.575,30.075 v1(10.1,30.075)
  Top Layer w0.25: v1(14.15,84.55) 14.15,83.735 16.025,81.86 16.565,81.86 IC2.15
  Layer 2 w0.2: v1(10.1,30.075) 10.1,43.117 21.025,54.042 21.025,74.548 14.825,80.748 14.825,82.791 14.15,83.466 v1@14.15,84.525
GND: C1.2 C2.1 C4.2 C5.2 C6.2 C7.2 C8.2 C9.2 C10.2 C11.2 C12.2 C13.2 C14.1 C15.1 C16.1 C17.1 C18.1 C19.1 C20.2 C21.1 C22.2 C23.2 C24.2 C25.2 C26.1 C27.2 C28.2 C29.1 C30.1 D1.A DD1.3 DD1.5 DD1.6 IC1.4 IC2.25 J1.8 J1.15 J1.16 R1.1 R2.1 R3.1 R4.1 R5.1 R6.1 R7.1 R8.1 R10.2 R20.1 R31.1 R33.2 R34.1 R36.1 R37.1 R38.1 U1.10 U1.20 U1.27 U1.74 U1.99 VD1.K VR1.1 X1.3 X1.4 X1.7 X1.8 X2.3 X2.4 X2.7 X2.8 X3.3 X4.2 X4.4 X5.2 X5.4 XP1.3 XP2.3 XP3.2
  other v2: 29.025,75.9 27.85,76 28.95,77.125 17.825,81 19.1,81 17.825,82.125 19.1,82.125 26.3,86.55 26.3,87.55 26.3,88.55
I2C_CLK: R11.1 U1.92 X1.5 X2.5 | length 119.5
  Top Layer w0.2: U1.92 20.52,26.49 22.454,26.49 22.919,26.025 R11.1
  Layer 3 w0.2: v1(22.4,26.544) 22.4,26.675 21.225,27.85 21.225,35.675 1.075,55.825 1.075,85.075 2.95,86.95 8.659,86.95 9.8,85.809 10.661,85.809 X2.5 10.85,85.649 15.351,90.15 36.8,90.15 41.33,85.62 X1.5
I2C_DATA: R12.1 U1.93 X1.6 X2.6 | length 120.6
  Top Layer w0.2: U1.93 21.887,26.95 22.256,27.319 v1(23.175,27.319) 23.283,27.319 23.688,27.725 R12.1
  Layer 3 w0.2: v1(23.175,27.319) 23.175,35.025 4.675,53.525 2.3,55.9 2.3,84.4 3.675,85.775 8.155,85.775 X2.6 9.73,84.2 11.625,84.2 12.825,85.4 12.825,86.325 15.95,89.45 36.35,89.45 41.425,84.375 44.395,84.375 X1.6
MAC_b0: S1.1 U1.55 | length 92.1
  Top Layer w0.2: v1(8.1,14.15) 8.8,14.85 U1.55
  Layer 3 w0.2: v1(8.1,14.15) 8.1,12.491 8.641,11.95 13.9,11.95 15.55,13.6 15.55,16.237 26.7,27.387 26.7,77.2 28.515,79.015 S1.1
MAC_b1: S1.2 U1.56 | length 99.8
  Top Layer w0.2: v1(8.825,13.525) 9.3,14 U1.56
  Layer 3 w0.2: v1(8.825,13.525) 8.825,14.75 8.275,15.3 7.425,15.3 6.85,14.725 6.85,13.175 8.475,11.55 14.675,11.55 15.95,12.825 15.95,16.072 27.1,27.222 27.1,76.925 29.225,79.05 29.225,85.61 S1.2
MAC_b2: S1.3 U1.57 | length 87.7
  Top Layer w0.2: U1.57 9.838,16.733 9.838,13.238 v1(9.875,13.2)
  Layer 2 w0.2: v1(9.875,13.2) 9.875,16.65 19.825,26.6 19.825,32.85 26.25,39.275 26.25,76.8 33.595,84.145 S1.3
MAC_b3: S1.4 U1.58 | length 89
  Top Layer w0.2: U1.58 10.3,13.825 v1(10.9,13.225)
  Layer 2 w0.2: v1(10.9,13.225) 10.325,13.8 10.325,16.2 20.6,26.475 20.6,32.55 26.9,38.85 26.9,76.2 36.175,85.475 36.175,87.4 S1.4
MAC_b4: S2.1 U1.59 | length 86.9
  Top Layer w0.2: U1.59 10.8,14.71 11.075,14.435 v1(11.075,14.3)
  Layer 3 w0.2: v1(11.075,14.3) 11.171,14.396 11.446,14.396 25.1,28.05 25.1,81.794 21.544,85.35 19.275,85.35 17.473,87.152 16.828,87.152 S2.1
MAC_b5: S2.2 U1.60 | length 86.9
  Top Layer w0.2: U1.60 11.3,15.35 11.95,14.7 v1(11.95,13.225)
  Layer 3 w0.2: v1(11.95,13.225) 11.95,14.334 25.5,27.884 25.5,81.959 21.659,85.8 20.72,85.8 S2.2
MAC_b6: S2.3 U1.61 | length 83.8
  Top Layer w0.2: U1.61 11.8,15.425 12.504,14.721 12.504,14.171 v1(12.672,14.003)
  Layer 3 w0.2: v1(12.672,14.003) 13.2,14.531 13.2,15.019 25.9,27.719 25.9,82.125 21.62,86.405 S2.3
MAC_b7: S2.4 U1.62 | length 84.5
  Top Layer w0.2: U1.62 12.3,15.5 13.625,14.175 13.625,13.225 v1(13.6,13.2)
  Layer 3 w0.2: v1(13.6,13.2) 13.6,14.853 26.3,27.553 26.3,85.3 S2.4
NetC11_1: C11.1 U1.73 | length 2.6
  Top Layer w0.2: U1.73 17.8,14.925 18.225,14.5 C11.1
NetC14_2: C14.2 R23.2 U1.6 XP1.2 | length 40.7
  Top Layer w0.2: XP1.2 7.675,8.2 R23.2 7.75,10.875 v1(9.05,10.875) ; v1(18.4,29.95) 17.509,29.95 16.3,31.159 U1.6 16.3,33.975 19.825,37.5 C14.2
  Layer 2 w0.2: v1(9.05,10.875) 6.8,13.125 6.8,15.225 10.625,19.05 10.625,20.125 16.775,26.275 16.775,28.325 v1(18.4,29.95)
NetC15_2: C15.2 U1.12 X4.3 | length 6.3
  Top Layer w0.2: U1.12 13.3,34.65 14.05,35.4 C15.2 14.3,35.75 14.3,36.175 15.525,37.4 X4.3
NetC17_2: C17.2 U1.13 X4.1 | length 10.5
  Top Layer w0.2: U1.13 12.8,34.175 12.525,34.45 12.525,38.55 12.813,38.838 12.863,38.838 13.725,39.7 13.725,39.9 13.275,40.35 13.262,40.35 13.144,40.467 C17.2
NetC23_1: C23.1 C24.1 IC2.6 | length 6.2
  Top Layer w0.25: IC2.6 21.173,82.845 21.816,83.488 v1(21.938,83.488)
  Bottom Layer w0.25: v1(21.938,83.488) 22.017,83.488 22.455,83.05 24.175,83.05 24.35,83.225 C24.1@24.35,83.25 ; C24.1@24.668,82.932 24.786,83.05 C23.1
NetC26_2: C26.2 IC2.4 X5.3 | length 9.9
  Top Layer w0.25: IC2.4 23.338,81.845 23.817,82.325 25.25,82.325 26.3,81.275 X5.3 26.3,80.025 26.875,79.45 v1(26.95,79.45)
  Bottom Layer w0.25: v1(26.95,79.45) 26.975,79.475 28.075,79.475 C26.2
NetC29_2: C29.2 IC2.5 X5.1 | length 8.6
  Top Layer w0.25: IC2.5 22.37,82.345 23.525,83.5 24.475,83.5 X5.1 24.5,84.67 24.075,85.095 v1(24.075,85.2)
  Bottom Layer w0.25: v1(24.075,85.2) 24.197,85.2 24.472,84.925 C29.2 C29.2@25.45,85.15
NetC30_2: C30.2 U1.49 | length 2.8
  Top Layer w0.2: C30.2 2.55,18.95 U1.49
NetD1_C: D1.C DD1.2 L1.P$1 | length 15.8
  Top Layer w1: L1.P$1 38.4,45.332 39.9,43.832 D1.C 44.453,43.832 45.35,42.935 DD1.2
NetDD1_4: DD1.4 R9.1 R10.1 | length 16.9
  Top Layer w0.3: R9.1 29.675,37.875 30.975,39.175 R10.1 42,35.325 DD1.4
NetIC1_1: IC1.1 U1.77 | length 12.3
  Top Layer w0.254: U1.77 24.1,18.95 25.35,20.2 29.25,20.2 29.955,20.905 IC1.1
NetIC1_2: IC1.2 U1.79 | length 9.9
  Top Layer w0.254: U1.79 22.725,19.95 23.625,20.85 27.385,20.85 28.685,22.15 IC1.2
NetIC1_3: IC1.3 U1.81 | length 9.2
  Top Layer w0.254: U1.81 22,20.95 23.377,22.327 25.226,22.327 25.375,22.178 25.375,21.65 25.508,21.517 26.782,21.517 27.415,22.15 IC1.3
NetIC1_5: IC1.5 U1.80 | length 18.2
  Top Layer w0.25: U1.80 22.55,20.45 23.725,21.625 24.575,21.625 v1(24.6,21.65) ; v1(26.1,14.15) 26.122,14.172 26.122,18.127 IC1.5
  Bottom Layer w0.25: v1(24.6,21.65) 22.8,19.85 22.8,19.025 26.1,15.725 v1(26.1,14.15)
NetIC1_6: IC1.6 U1.78 | length 15.7
  Top Layer w0.2: U1.78 23.115,19.45 23.425,19.76 23.462,19.723 v1(23.627,19.723) ; IC1.6 27.45,18.115 v1(27.45,13.55)
  Bottom Layer w0.2: v1(23.627,19.723) 27.45,15.9 v1(27.45,13.55)
NetIC1_7: IC1.7 U1.82 | length 20.6
  Top Layer w0.2: U1.82 21.45,21.45 23.075,23.075 v1(24.575,23.075) ; v1(28.625,13.55) 28.625,18.09 IC1.7
  Bottom Layer w0.2: v1(24.575,23.075) 28.625,19.025 v1(28.625,13.55)
NetIC2_2: IC2.2 J1.12 R38.2 | length 27.8
  Top Layer w0.2: IC2.2 21.536,80.845 21.956,80.425 v1(22.875,80.425)
  Layer 3 w0.2: J1.12 21.775,63.35 21.775,79.325 v1(22.875,80.425)
  Bottom Layer w0.2: J1.12 18.375,57.3 R38.2
NetIC2_3: IC2.3 J1.9 R37.2 | length 47.4
  Top Layer w0.2: IC2.3 22.055,81.345 22.325,81.075 23.144,81.075 23.525,80.694 23.525,80.156 23.375,80.006 v1(23.375,79.635)
  Layer 3 w0.2: J1.9 5.15,59.925 5.15,58.4 6.625,56.925 18.25,56.925 23.375,62.05 v1(23.375,79.635)
  Bottom Layer w0.2: R37.2 J1.9
NetIC2_7: IC2.7 R30.2 | length 71.5
  Top Layer w0.25: IC2.7 20.515,83.49 v1(21.5,84.475)
  Layer 2 w0.2: v1(12.839,24.541) 12.922,24.458 14.392,24.458 16.375,26.441 16.375,31.175 24.625,39.425 24.625,81.72 21.768,84.577 21.761,84.57 21.595,84.57 v1(21.5,84.475)
  Bottom Layer w0.2: R30.2 11.116,24.541 v1(12.839,24.541)
NetIC2_8: IC2.8 R29.2 | length 69.4
  Top Layer w0.2: IC2.8 19.265,83.53 19.265,83.898 19.921,84.554 20.379,84.554 v1(20.475,84.65)
  Layer 2 w0.2: v1(13.9,25.975) 15.85,27.925 15.85,31.975 24.025,40.15 24.025,80.875 22.625,82.275 22.231,82.275 20.506,84 20.506,84.619 v1(20.475,84.65)
  Bottom Layer w0.2: R29.2 11.1,25.975 v1(13.9,25.975)
NetIC2_10: IC2.10 R31.2 | length 8
  Top Layer w0.25: R31.2 18.525,86.15 18.875,85.8 18.875,85.086 18.225,84.436 IC2.10
NetIC2_11: IC2.11 R32.2 | length 92.2
  Top Layer w0.25: IC2.11 17.71,83.505 17.71,84.955 17.725,84.97 17.725,85 v1(18.05,85.325)
  Layer 2 w0.2: v1(13.675,27.475) 10.875,24.675 10.875,23.183 6.479,18.787 6.313,18.787 5.775,19.325 5.775,24.125 22.675,41.025 22.675,78.85 21.225,80.3 21.225,82.15 v1(18.05,85.325)
  Bottom Layer w0.2: R32.2 11.15,27.475 v1(13.675,27.475)
NetIC2_14: IC2.14 R35.2 | length 58.6
  Top Layer w0.25: R35.2 7.3,39.15 v1(11.1,42.95) ; v1(15.048,84.612) 15.048,83.474 16.161,82.36 16.565,82.36 IC2.14
  Layer 2 w0.25: v1(11.1,42.95) 21.45,53.3 21.45,74.724 15.25,80.924 15.25,82.967 15.048,83.169 v1(15.048,84.612)
NetIC2_24: IC2.24 R33.1 | length 3.8
  Top Layer w0.25: IC2.24 19.725,79.03 20.93,77.825 R33.1
NetJ1_10: J1.10 R34.2 | length 2.8
  Bottom Layer w0.25: J1.10 9.425,59.95 10.125,60.65 R34.2
NetJ1_11: J1.11 R36.2 | length 2.7
  Bottom Layer w0.25: R36.2 13.475,60.5 14.025,59.95 J1.11
NetR1_2: R1.2 S1.8 | length 2.3
  Bottom Layer w0.5: R1.2 27.775,94.103 28.515,94.843 S1.8
NetR2_2: R2.2 S1.7 | length 2.2
  Bottom Layer w0.5: R2.2 30.575,94.309 31.055,94.789 S1.7
NetR3_2: R3.2 S1.6 | length 2.1
  Bottom Layer w0.5: R3.2 33.425,93.1 33.425,94.89 S1.6
NetR4_2: R4.2 S1.5 | length 2
  Bottom Layer w0.5: S1.5 36.155,95.04 36.155,93.1 R4.2
NetR5_2: R5.2 S2.8 | length 2
  Bottom Layer w0.5: S2.8 16.558,95.042 16.558,93.1 R5.2
NetR6_2: R6.2 S2.7 | length 2.1
  Bottom Layer w0.5: S2.7 19.08,94.789 19.375,94.494 R6.2
NetR7_2: R7.2 S2.6 | length 2.2
  Bottom Layer w0.5: S2.6 21.62,94.789 22.175,94.234 R7.2
NetR8_2: R8.2 S2.5 | length 2.3
  Bottom Layer w0.5: S2.5 24.16,94.993 24.975,94.178 R8.2
NetR19_1: R19.1 VD1.A | length 2.5
  Top Layer w0.2: VD1.A 46.675,93.425 R19.1
NetR20_2: R20.2 U1.94 | length 3.6
  Top Layer w0.2: U1.94 21.602,27.45 22.376,28.224 v1(22.376,28.301)
  Top Layer w0.4: v1(22.376,28.301) 22.433,28.359 22.433,28.709 23,29.275 R20.2
NetR21_1: R21.1 U1.7 | length 41.8
  Top Layer w0.2: U1.7 15.8,30.831 17.831,28.8 v1(18.45,28.8) ; v1(30.85,11.85) 30.925,11.775 R21.1
  Bottom Layer w0.2: v1(18.45,28.8) 17.525,28.8 16.075,27.35 16.075,21.25 29.9,7.425 31.3,7.425 32.2,8.325 32.2,10.5 v1(30.85,11.85)
NetR21_2: R21.2 VD2.K | length 2.4
  Top Layer w0.2: R21.2 36.375,11.775 VD2.K
NetR22_1: R22.1 U1.8 | length 30.2
  Top Layer w0.2: U1.8 15.3,30.1 18.7,26.7 v1(18.7,26.675)
  Top Layer w0.25: v1(30.925,13.85) 31.011,13.936 31.561,13.936 32.475,14.85 R22.1
  Bottom Layer w0.25: v1(18.7,26.675) 20.75,26.675 22.6,24.825 26.375,24.825 30.925,20.275 v1(30.925,13.85)
NetR22_2: R22.2 VD3.K | length 2.4
  Top Layer w0.2: R22.2 36.375,14.95 VD3.K
NetR24_1: R24.1 U1.9 | length 35.6
  Top Layer w0.2: U1.9 14.8,28.675 v1(17.8,25.675) ; v1(30.75,8.7) 30.885,8.7 31.136,8.45 R24.1
  Bottom Layer w0.2: v1(17.8,25.675) 18.95,25.675 20.475,24.15 25.625,24.15 29.8,19.975 29.8,9.65 v1(30.75,8.7)
NetR24_2: R24.2 VD4.K | length 2.4
  Top Layer w0.2: R24.2 36.375,8.45 VD4.K
NetR39_1: R39.1 XP2.2 | length 43
  Top Layer w0.2: R39.1 24.55,34.225 25.25,33.525 v1(27.85,33.525)
  Layer 2 w0.2: XP2.2 22.715,9.325 19.35,9.325 14.975,13.7 14.975,17.65 27.85,30.525 v1(27.85,33.525)
NetR39_2: R39.2 U1.1 | length 4
  Top Layer w0.2: U1.1 20.28,32.13 21.2,33.05 R39.2
NetU1_72: U1.72 X3.2 | length 37.6
  Top Layer w0.2: v1(16.6,14.6) 17.3,15.3 U1.72
  Layer 2 w0.2: v1(16.6,14.6) 21.1,14.6 25.475,10.225 33.925,10.225 40.475,16.775 X3.2
NetU1_76: U1.76 X3.4 | length 45.7
  Top Layer w0.2: U1.76 21.12,18.45 21.874,17.696 22.029,17.696 v1(22.125,17.6)
  Layer 2 w0.2: v1(22.125,17.6) 17.05,17.6 15.475,16.025 15.475,13.95 19.7,9.725 34.7,9.725 36.67,11.695 X3.4
P1_RX_N: IC2.22 J1.6 R25.1 | length 12.5
  Top Layer w0.25: J1.6 13.65,72.541 13.782,72.409 13.968,72.409 14.287,72.728 15.697,72.728 15.709,72.716 16.614,72.716 18.336,74.437 18.336,76.493 18.204,76.625 18.2,76.625 17.975,76.85 R25.1 17.975,77.05 18.2,77.275 18.204,77.275 18.336,77.407 18.336,78.252 18.721,78.637 18.721,79.696 IC2.22
P1_RX_P: IC2.23 J1.3 R26.1 | length 17.3
  Top Layer w0.25: J1.3 10.864,70.176 12.804,70.176 13.404,70.776 13.404,71.209 14.1,71.905 14.177,71.905 14.496,72.224 15.488,72.224 15.5,72.212 16.823,72.212 18.839,74.229 18.839,76.493 18.971,76.625 18.975,76.625 19.2,76.85 R26.1 19.2,77.05 18.975,77.275 18.971,77.275 18.839,77.407 18.839,78.043 19.225,78.428 IC2.23
P1_TX_N: IC2.20 J1.2 R27.1 | length 15.9
  Top Layer w0.25: J1.2 8.57,72.465 8.702,72.333 8.888,72.333 9.594,73.039 9.594,74.309 9.73,74.444 9.73,74.521 11.384,76.175 12.104,76.175 12.235,76.307 12.235,76.493 12.104,76.625 12.1,76.625 11.875,76.85 R27.1 11.875,77.05 12.1,77.275 12.104,77.275 12.235,77.407 12.235,77.802 12.945,78.511 17.246,78.511 17.721,78.986 17.721,79.696 IC2.20
P1_TX_P: IC2.21 J1.1 R28.1 | length 17
  Top Layer w0.25: J1.1 8.132,72.032 8.366,72.032 8.515,71.883 9.075,71.883 10.044,72.852 10.044,74.122 11.593,75.671 12.312,75.671 12.74,76.098 12.74,76.493 12.871,76.625 12.875,76.625 13.1,76.85 R28.1 13.1,77.05 12.875,77.275 12.871,77.275 12.74,77.407 12.74,77.593 13.153,78.007 17.455,78.007 18.225,78.777 IC2.21
RESET: U1.14 X3.1 | length 43
  Top Layer w0.254: v1(12.025,33.775) 12.025,33.654 12.3,33.379 U1.14
  Bottom Layer w0.254: v1(12.025,33.775) 21.2,33.775 29.5,25.475 41.09,25.475 X3.1
RMII_CRS_DV: R32.1 U1.32 | length 4.3
  Top Layer w0.2: U1.32 7.3,27.45 7.325,27.425 v1(7.85,27.425)
  Bottom Layer w0.2: v1(7.85,27.425) 9.35,27.425 R32.1
RMII_MDC: IC2.13 U1.16 | length 63.1
  Top Layer w0.2: v1(11.025,34.375) 11.025,34.24 11.3,33.965 U1.16
  Top Layer w0.25: v1(16.025,85.238) 16.025,85.125 16.58,84.57 IC2.13
  Layer 2 w0.2: v1(11.025,34.375) 21.875,45.225 21.875,74.9 15.675,81.1 15.675,84.441 15.698,84.464 15.698,84.775 16.025,85.102 v1(16.025,85.238)
RMII_MDIO: IC2.12 U1.25 | length 71.3
  Top Layer w0.2: U1.25 6.8,30.7 v1(8.375,29.125)
  Top Layer w0.25: v1(17.05,85.25) 17.05,85.125 17.225,84.95 IC2.12
  Layer 2 w0.2: v1(8.375,29.125) 10.069,29.125 22.275,41.331 22.275,75.125 16.075,81.325 16.075,84.275 v1(17.05,85.25)
RMII_REF_CLK: R35.1 U1.24 | length 4
  Top Layer w0.2: U1.24 R35.1
RMII_RXD0: R29.1 U1.33 | length 4.7
  Top Layer w0.2: U1.33 6.7,26.95 6.908,26.742 7.297,26.742 v1(7.385,26.654)
  Bottom Layer w0.2: v1(7.385,26.654) 8.14,25.9 R29.1
RMII_RXD1: R30.1 U1.34 | length 5.3
  Top Layer w0.2: U1.34 5.16,26.41 6.065,26.41 7.825,24.65 v1@7.825,24.396
  Bottom Layer w0.2: v1(7.826,24.395) 9.37,24.395 R30.1
RMII_TX_EN: IC2.16 U1.48 | length 88.3
  Top Layer w0.2: U1.48 5.16,19.49 5.984,19.49 7.1,20.606 v1(7.1,22.75)
  Top Layer w0.25: v1(13.35,83.8) 15.805,81.345 IC2.16
  Layer 2 w0.2: v1(7.1,22.75) 8.15,22.75 9.1,23.7 9.1,26.884 23.075,40.859 23.075,79.016 21.625,80.466 21.625,82.316 19.825,84.116 19.825,84.9 18.533,86.192 14.542,86.192 13.35,85 v1(13.35,83.8)
RMII_TXD0: IC2.17 U1.51 | length 81.7
  Top Layer w0.2: U1.51 6.8,18.375 7.829,19.404 7.881,19.352 v1(8.046,19.352) ; v1(13.35,82.7) 15.205,80.845 IC2.17
  Layer 2 w0.2: v1(8.046,19.352) 6.894,18.2 6.3,18.2 5.05,19.45 5.05,45.522 13.379,53.851 13.379,65.65 17.8,70.071 17.8,77.207 14.118,80.89 14.118,81.932 v1(13.35,82.7)
RMII_TXD1: IC2.18 U1.52 | length 81.8
  Top Layer w0.2: U1.52 7.3,17.85 8.071,18.621 8.235,18.621 9.125,19.512 v1(9.125,19.6) ; v1(12.95,81.825) 13.2,81.825 14.68,80.345 IC2.18
  Layer 2 w0.2: v1(9.125,19.6) 9.125,19.512 7.413,17.8 6.134,17.8 4.65,19.284 4.65,45.688 8.73,49.768 8.73,64.877 6.301,67.306 6.301,72.884 12.95,79.533 v1(12.95,81.825)
RX: U1.69 XP3.1 | length 10.6
  Top Layer w0.2: U1.69 15.8,9.722 XP3.1
TX: U1.68 XP3.3 | length 10.4
  Top Layer w0.2: XP3.3 15.3,9.307 U1.68
V_24pwr: C1.1 DD1.1 R19.2 X1.1 X1.2 X2.9 X2.10 | length 103.5
  Top Layer w0.2: X1.2@45.65,90.7 48.325,93.375 R19.2
  Top Layer w1: X1.1 X1.2 45.65,90.7 48.464,90.7 48.816,90.349 48.816,63.041 45.925,60.15 C1.1 45.925,56.191 48.816,53.3 48.816,38.116 47.05,36.35 DD1.1
  Bottom Layer w1: X2.10 X2.9 13.55,90.7 14.525,89.725 42.125,89.725 X1.1
pads on no net: J1. J1.7 U1.2 U1.3 U1.4 U1.5 U1.15 U1.17 U1.18 U1.26 U1.29 U1.30 U1.31 U1.35 U1.36 U1.37 U1.38 U1.39 U1.40 U1.41 U1.42 U1.43 U1.44 U1.45 U1.46 U1.47 U1.53 U1.54 U1.63 U1.64 U1.65 U1.66 U1.67 U1.70 U1.71 U1.83 U1.84 U1.85 U1.86 U1.87 U1.88 U1.89 U1.90 U1.91 U1.95 U1.96 U1.97 U1.98

## Polygon pours and split planes (outlines as drawn)
GND on Bottom Layer "GND" (solid, remove dead copper, pour order 0): 0,0 0,100 50,100 50,0
GND on Layer 3 "GND" (solid, remove dead copper, pour order 1): 0,0 0,100 50,100 50,0
GND on Layer 2 "GND" (solid, remove dead copper, pour order 2): 0,0 0,100 50,100 50,0
GND on Top Layer "GND" (solid, remove dead copper, pour order 3): 0,0 0,100 50,100 50,0

## Keep-outs
Keep-Out Layer:
  the board outline again, w0.3

## Silkscreen, mask and mechanical layers (free items; w line width, h text height)
Top Overlay:
  lines w0.2: 26.725,58.175 26.725,78.175 36.75,78.175 36.75,58.175 ; 38.45,58.175 38.45,78.175 48.425,78.175 48.425,58.175